# Altium PCB xbreak-k.PcbDoc
Units mm, origin at the board's own origin, x right, y up, seen from the top; angles counter-clockwise.
Board outline 43 x 44 mm, 2 copper layers (Top Layer, Bottom Layer); 26 components, 23 nets, 90 pads, 0 vias.
Unrouted connection lines stored in the file: 61.
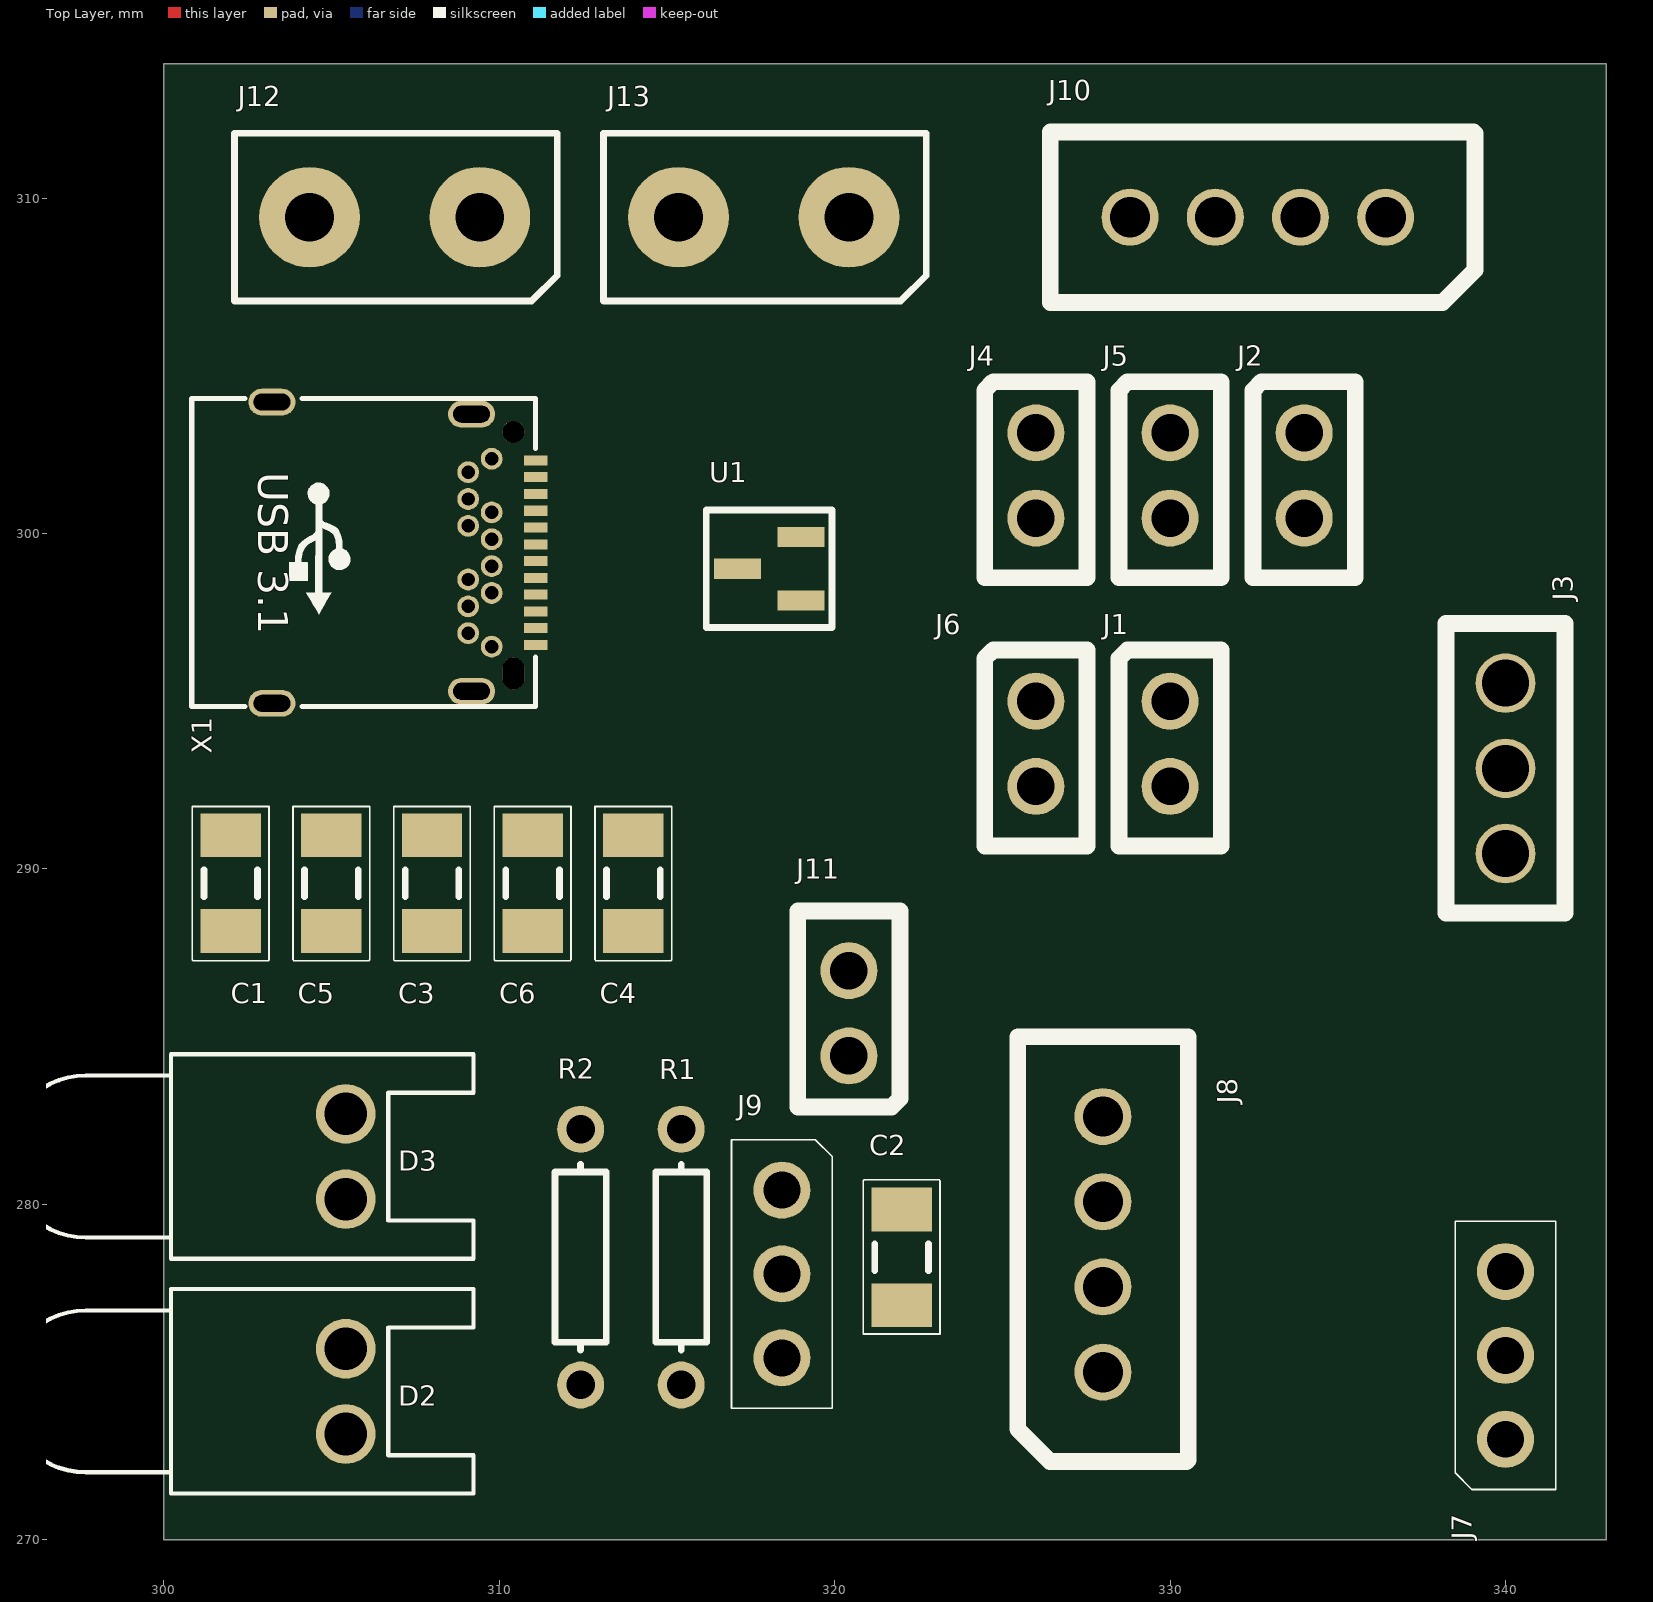
[diagram p0: Top Layer view]
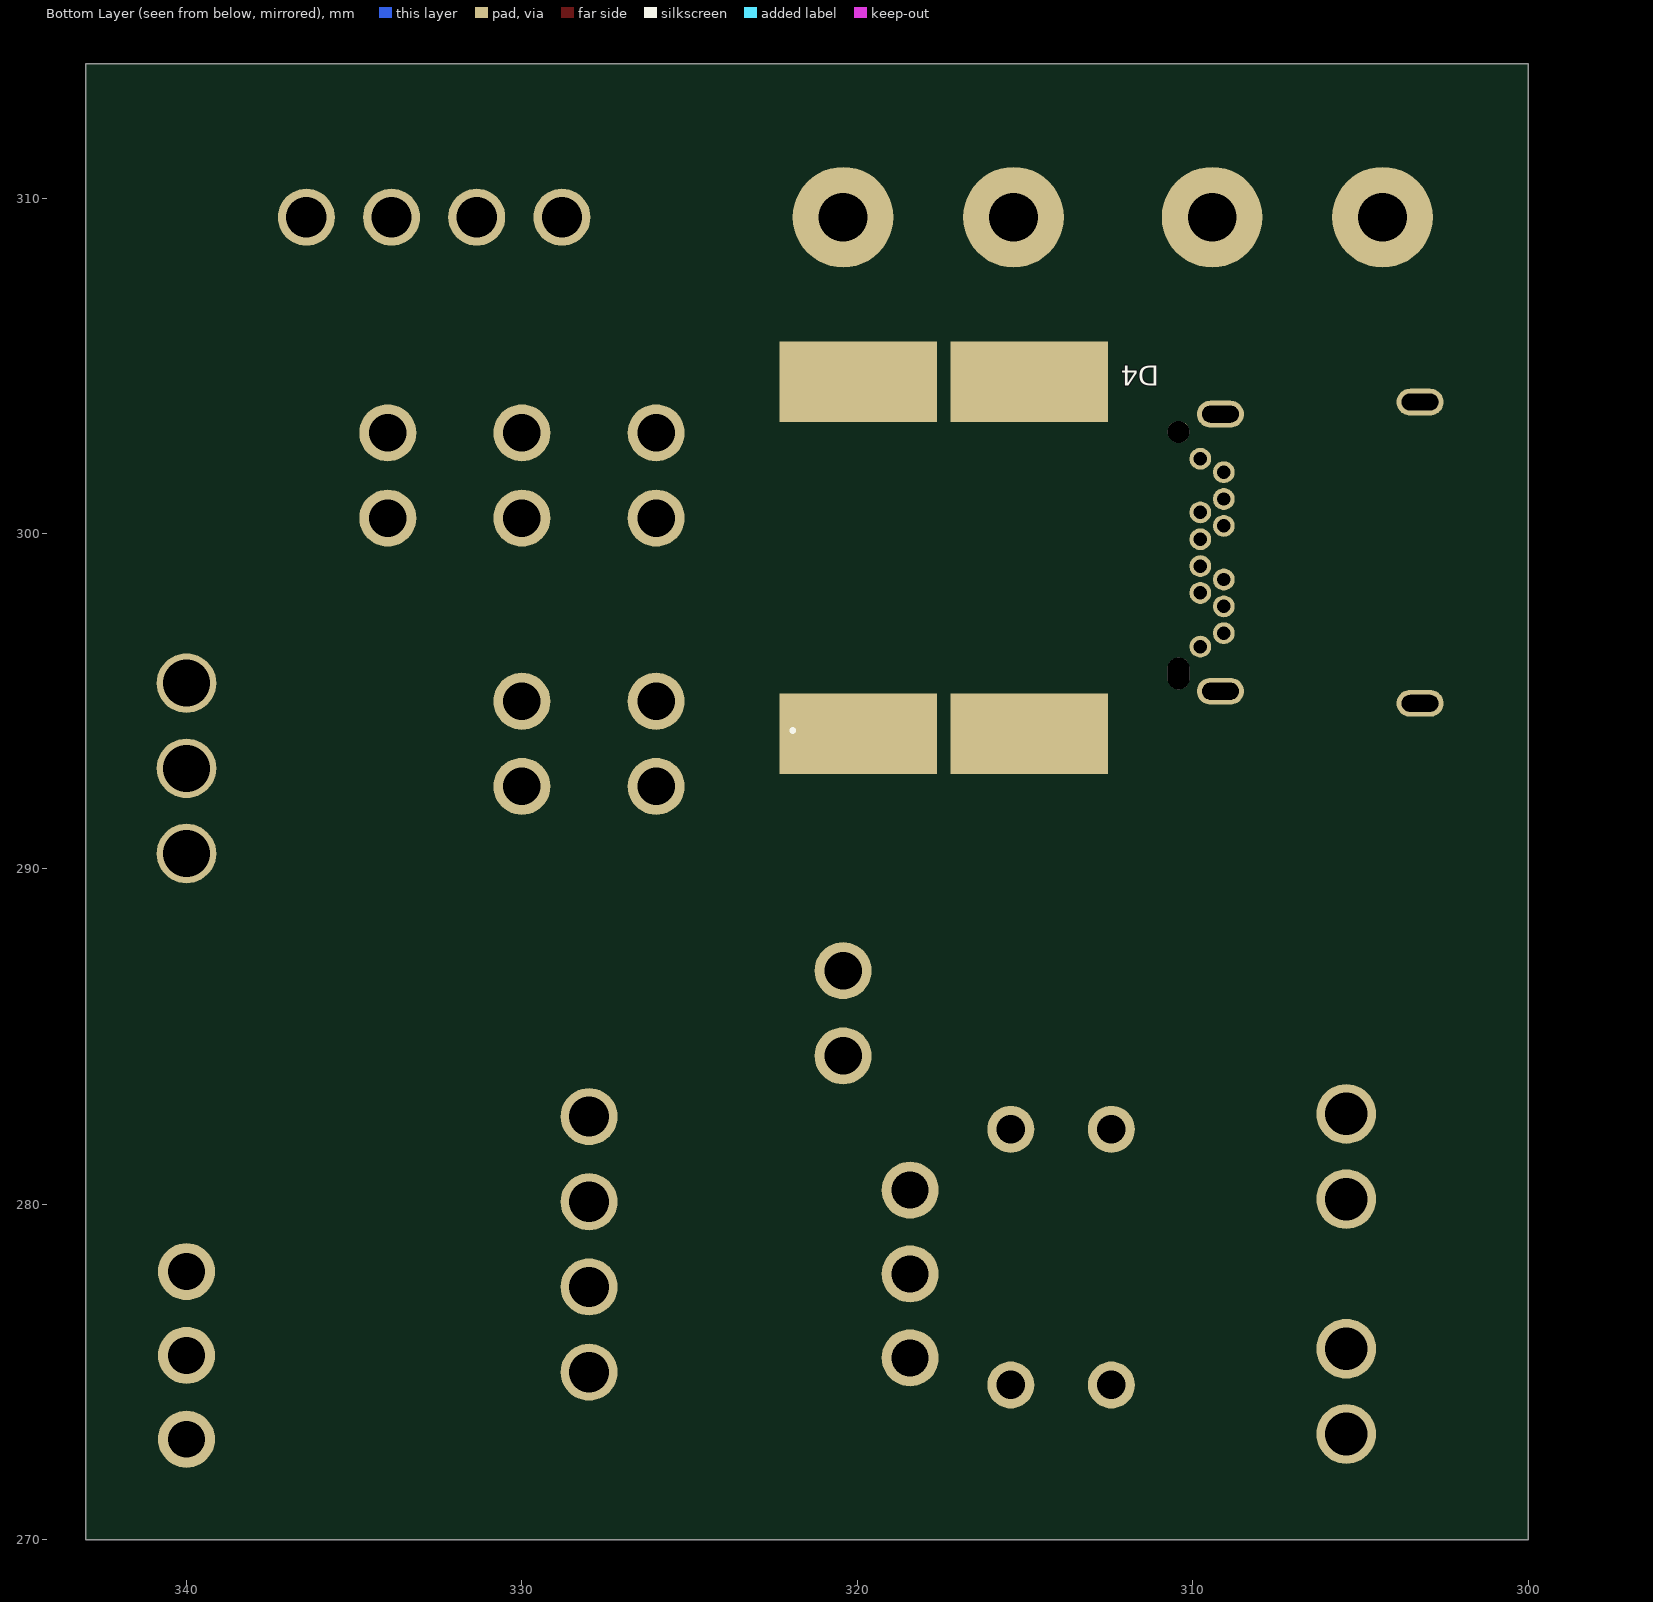
[diagram p1: Bottom Layer view, seen from below]

## Layer stack, top to bottom
Top Solder: solder mask 0.0102, Solder Resist, Dk 3.5
Top Layer: signal copper 0.0356
Dielectric 1: dielectric 0.32, FR-4, Dk 4.8
Bottom Layer: signal copper 0.0356
Bottom Solder: solder mask 0.0102, Solder Resist, Dk 3.5

## Board outline
300,314 300,270 343,270 343,314

## Design rules (kind name [scope] priority, off if disabled: settings)
Clearance [All] p1: gap=0.254
PolygonConnect [All] p1: connectstyle=Relief reliefconductorwidth=0.254 reliefentries=4 polygonreliefangle="90 Angle" airgapwidth=0.254
RoutingVias [All] p1: holewidth=0.711 width=1.27 viastyle="Through Hole" minholewidth=0.711 minwidth=1.27 maxholewidth=0.711 maxwidth=1.27
SolderMaskExpansion [All] p1: expansion=0.102
Width [All] p1: maxlimit=0.254 minlimit=0.254 preferedwidth=0.254
30 further rules are at their usual default settings.

## Components (designator, comment, footprint, x,y, rotation, side; value= is the part's Value field where it differs from the comment)
C1 "0.1UF 50V X7R" C1206YageoX7R 302,291 r270 top
C2 "0.1UF 50V X7R" C1206YageoX7R 322,277 r90 top
C3 "1UF 25V X7R" C1206YageoX7R 308,291 r270 top
C4 "1UF 25V X7R" C1206YageoX7R 314,291 r270 top
C5 "1UF 25V X7R" C1206YageoX7R 305,291 r270 top
C6 "1UF 25V X7R" C1206YageoX7R 311,291 r270 top
D2 "LED0" LED-0 305.428,274.428 r270 top
D3 "LED0" LED-0 305.428,281.428 r270 top
D4 "600V 4A Bridge Rect" Z4DGP406L-HF 317.428,299.428 r90 bottom
J1 "B2B-XH-A(LF)(SN)" 77311-118-02LF 330,295 r270 top
J2 "B2B-XH-A(LF)(SN)" 77311-118-02LF 334,303 r270 top
J3 "929400-01-36-RK" 929400-01-36-RK 340,293 r90 top
J4 "B2B-XH-A(LF)(SN)" 77311-118-02LF 326,303 r270 top
J5 "B2B-XH-A(LF)(SN)" 77311-118-02LF 330,303 r270 top
J6 "B2B-XH-A(LF)(SN)" 77311-118-02LF 326,295 r270 top
J7 "JST 3-PIN" B3B-XH-A(LF)(SN) 340,273 r90 top
J8 "B4B-PH-K-S(LF)(SN)" B4B-PH-K-S(LF)(SN) 328,275 r90 top
J9 "JST 3-PIN" B3B-XH-A(LF)(SN) 318.428,280.428 r270 top
J10 "B4B-XH-A(LF)(SN)" B4B-PH-K-S(LF)(SN) 336.428,309.428 r180 top
J11 "B2B-XH-A(LF)(SN)" 77311-118-02LF 320.428,284.428 r90 top
J12 "EM250502V" EM250502V 309.428,309.428 r180 top
J13 "EM250502V" EM250502V 320.428,309.428 r180 top
R1 "1K 1/4 Watt Thru Hole" AXIAL-0.3 315.428,278.428 r90 top
R2 "1K 1/4 Watt Thru Hole" AXIAL-0.3 312.428,278.428 r90 top
U1 "MCP1702T-3302E/CB" MCP1702-SOT-23A 319,298 r180 top
X1 "USB_3_1" USB_3.1 310.428,299.428 r270 top

## Footprints (in the part's own frame and the unit in brackets; to place one, negate y for a bottom-side part, rotate by r counter-clockwise, add the part's x,y. Pads: shape width x height; smd on the part's side, far side on the other; paste and mask are expansions set on the pad)
77311-118-02LF [mm] "CONN HEADER 2POS VERT T/H"
  round 1.7 hole 1.12: 1(0,0) 2(2.54,0)
  silkscreen extent -1.52,-1.52 4.32,1.52
929400-01-36-RK [mil] "CONN HEADER .100 SNGL STR 36POS - 3 Positions Used"
  round 70 hole 55: 1(-100,0) 2(0,0) 3(100,0)
  silkscreen extent -170,-70 170,70
AXIAL-0.3 [mm] "Axial Device, Thru-Hole; 2 Leads; 0.3 in Pin Spacing"
  round 1.4 hole 0.85: 1(-3.81,0) 2(3.81,0)
  silkscreen extent -2.77,-0.76 2.77,0.76
B3B-XH-A(LF)(SN) [mm] "CONN HEADER XH TOP 3POS 2.5MM"
  round 1.7 hole 1.1: 1(0,0) 2(2.5,0) 3(5,0)
  silkscreen extent -1.5,-1.5 6.5,1.5
B4B-PH-K-S(LF)(SN) [mm] "B4B-PH-K-S(LF)(SN) 4 Pin JST Header"
  round 1.7 hole 1.2: 1(0,0) 2(2.54,0) 3(5.08,0) 4(7.62,0)
  silkscreen extent -2.66,-2.54 10,2.54
C1206YageoX7R [mm] "Chip Capacitor, 2-Leads, Body 3.20x1.60mm, IPC Medium Density"
  rect 1.3x1.8 smd: 1(0,0) 2(2.85,0)
  silkscreen extent -0.86,-1.14 3.73,1.14, body extent -0.25,-0.87 3.1,0.87, height 1.8
EM250502V [mm]
  round 3 hole 1.45: 1(0,0) 2(5.08,0)
  silkscreen extent -2.31,-2.5 7.32,2.5
LED-0 [mil] "LED; 2 Leads"
  round 70 hole 50: 1(50,0) 2(-50,0)
  silkscreen extent -120,-400 120,150
MCP1702-SOT-23A [mm]
  rect 1.4x0.6 smd: 1(0,0) 2(0,-1.9) 3(1.9,-0.95)
  silkscreen extent -0.92,-2.7 2.83,0.8, body extent -0.3,-2.45 2.2,0.55, height 1.07
USB_3.1 [mm]
  rect 0.3x0.7 smd: A1(-2.75,0.66) A2(-2.25,0.66) A3(-1.75,0.66) A4(-1.25,0.66) A5(-0.75,0.66) A6(-0.25,0.66) A7(0.25,0.66) A8(0.75,0.66) A9(1.25,0.66) A10(1.75,0.66) A11(2.25,0.66) A12(2.75,0.66)
  round 0.65 hole 0.4 mask+0: B1(2.8,-0.65) B2(2.4,-1.35) B3(1.6,-1.35) B4(1.2,-0.65) B5(0.8,-1.35) B6(0.4,-0.65) B7(-0.4,-0.65) B8(-0.8,-1.35) B9(-1.2,-0.65) B10(-1.6,-1.35) B11(-2.4,-1.35) B12(-2.8,-0.65)
  oval 0.8x1.4 hole 0.5 slot 1.1 at 90 deg mask+0: ""(-4.49,-7.2) ""(-4.13,-1.25) ""(4.13,-1.25) ""(4.49,-7.2)
  round 0.65 hole 0.65 unplated mask+0: ""(-3.6,0)
  oval 0.95x0.65 hole 0.65 slot 0.95 at 0 deg unplated mask+0: ""(3.6,0)
  silkscreen extent -4.59,-9.59 4.59,0.65, body extent -4.5,-9.6 4.5,0.83, height 3.3
Z4DGP406L-HF [mm] "DFN, 4-Leads, Body 8.10x10.50mm, Pitch 10.50mm, IPC Medium Density"
  rect 2.4x4.7 smd: 1(-5.4,2.55) 2(-5.4,-2.55) 3(5.1,-2.55) 4(5.1,2.55)
  silkscreen extent -5.35,4.45 -5.25,4.55, body extent -5.3,-4.1 5.3,4.1, height 1.55

## Part data
C1 C2: library part CC1206KRX7R9BB104, "CAP CER 0.1UF 50V X7R 1206 YAGEO CC1206KRX7R9BB104"
C3 C4 C5 C6: library part CC1206KKX7R8BB105, "CAP CER 1UF 25V X7R 1206 Yageo CC1206KKX7R8BB105"
D2 D3: "Typical INFRARED GaAs LED"
D4: library part Z4DGP406L-HF, "RECT BRIDGE GP 600V 4A Z4-D ComChip Z4DGP406L-HF"
J1 J2 J4 J5 J6 J11: "CONN HEADER XH TOP 2POS 2.5MM  JST B2B-XH-A(LF)(SN)"
J3: "3M 929400-01-36-RK CONN HEADER .100 SNGL STR 36POS - Use 3 Pin"
J7 J9: library part B3B-XH-A(LF)(SN), "CONN HEADER XH TOP 3POS 2.5MM JST B3B-XH-A(LF)(SN)"
J10: "CONN HEADER XH TOP 4POS 2.5MM JST B4B-XH-A(LF)(SN)"
J12 J13: "TERM BLOCK 16A 300V 12-26AWG Eaton Bussman EM250502V"
R1 R2: library part Res1, "Resistor"
U1: library part MCP1702, "IC REG LDO 3.3V 0.25A SOT23A-3 Microchip MCP1702T-3302E/CB"
X1: library part "USB 3.1", "USB 3.1 Connector"

## Nets (pads, with @x,y where several pads share a name; then routed paths per layer and width w, separated by ;. In a path a pad name is that pad's centre, name@x,y a point inside that pad or via, vN(x,y) a via of type N, cw(c..) or ccw(c..) an arc to the next point about the centre after c; other vN are vias at no path point)
ENDSTOP1: J7.1 X1.A11 X1.B11
GND: C1.2 C2.2 C3.2 C4.2 C5.2 C6.2 D4.4 J1.2 J2.2 J4.2 J5.2 J7.2 J8.4 J9.1 U1.1
H1THEM+: J11.1
H1THEM-: J11.2
HE1+: J12.1 X1.A4 X1.A9 X1.B4 X1.B9
HE1GND: J12.2 X1.A1 X1.A12 X1.B1 X1.B12
HE1THEM+: X1.A2
HE1THEM-: X1.B2
NetD2_2: D2.2 R1.1
NetD3_1: D3.1 R2.1
NetJ3_2: J3.2 J7.3
PF-: J6.2 X1.A10 X1.B3 X1.B10
S1P1+: J10.4 X1.A6
S1P1-: J10.3 X1.A7
S1P2+: J10.2 X1.B6
S1P2-: J10.1 X1.B7
SCL: J8.1 X1.A8
SDA: J8.2 X1.B8
SERVO1: J9.3 X1.A3
V5: C2.1 C4.1 C6.1 J3.1 J8.3 J9.2 U1.2
V12: C1.1 C3.1 C5.1 D4.1 J1.1 J2.1 J3.3 J4.1 J5.1 J6.1 U1.3
V12GND: D4.2 J13.2 R1.2 R2.2 X1.B5
V12IN: D2.1 D3.2 D4.3 J13.1 X1.A5
pads on no net: X1.

## Text inside footprints (layer, text, board x,y; h text height)
X1: Top Overlay "USB 3.1" at 302.528,301.828 h1.52 r270